# Altium PCB PCB2(1).PcbDoc (part 3 of 3)
Units mil, origin at the board's own origin, x right, y up, seen from the top; angles counter-clockwise.
Board outline 11695.71 x 3821.7 mil, 2 copper layers (Top Layer, Bottom Layer), stack 16 mil thick; 124 components, 59 nets, 380 pads, 1798 vias.
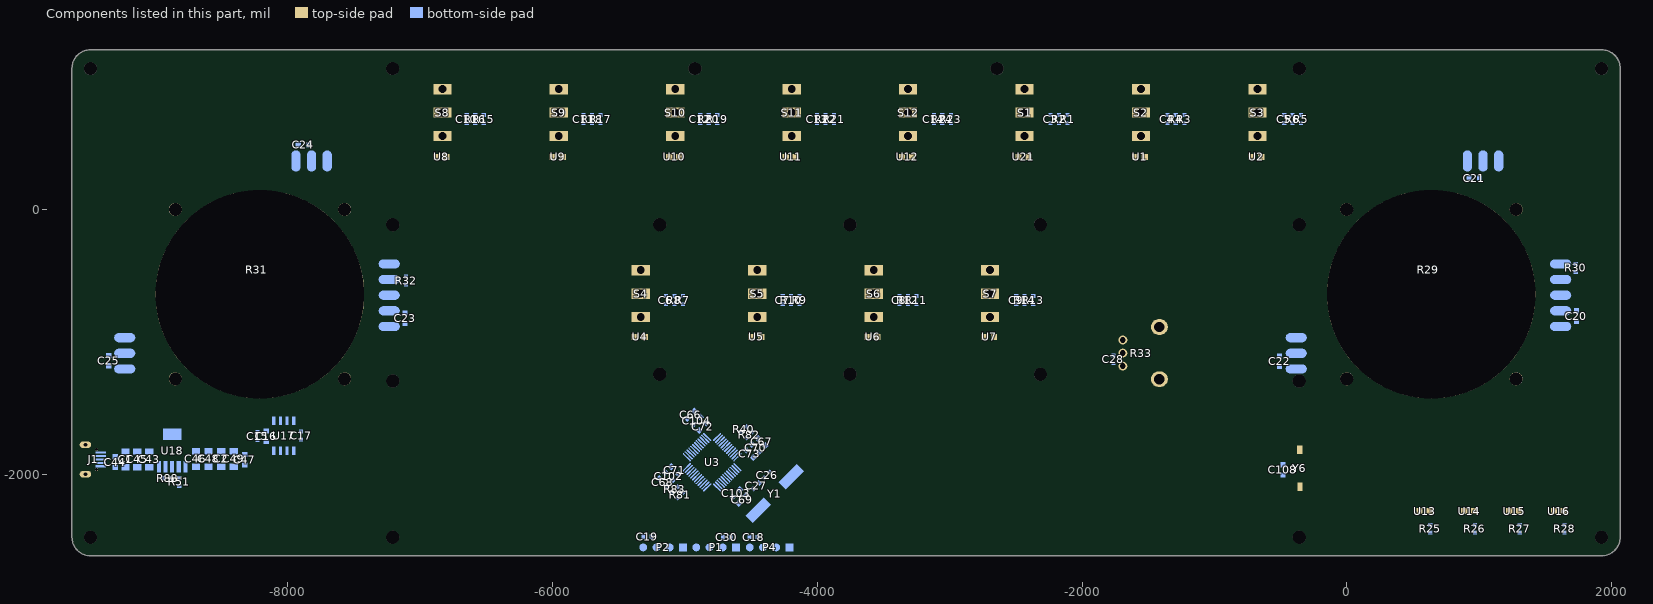
[diagram p3: the components of this part, seen from the top]

## Other copper
Top Layer:
  pour cut-out: -4827.88,-1635.3 -4740.73,-1405 -4740.73,-1635.75 -4739.88,-1636.59
  pour cut-out: -4801.5,-1646.23
  pour cut-out: -7265,300
  pour cut-out: -7332.61,306.63 -7332.61,240.73 -7592.29,500.41 -7795.94,500.41 -7806.02,510.49 -7806.02,523.73 -7554.62,523.73 -7553.24,525.12
  pour cut-out: -4585.5,-1322.38 -4590,-1317.88 -4590,-1190 -4461.47,-1190 -4456.47,-1195
  pour cut-out: -4707.28,-775 -4782.86,-775 -4706.24,-851.62
  pour cut-out: -4707.28,-775
  pour cut-out: -1315.45,-1841.44 -1312.86,-1844.02 -1095.19,-1844.02 -1095.19,-1862.83 -1302.7,-2070.34
  pour cut-out: -1374.7,-1986.35 -1374.7,-2022.76 -1374.7,-2120 -1359.07,-2120 -1305.67,-2066.59
  pour cut-out: -4333.33,-2326.23 -4333.33,-2323.33 -4196.24,-2186.24 -4196.24,-2330
  pour cut-out: -4335.08,980 -4059.49,980 -4059.49,482.16 -4335.08,482.16
  pour cut-out: -2629.22,-990 -2629.22,-983.21 -2406.02,-760 -2354.05,-760 -2346.08,-767.97 -2562.5,-984.38 -2562.5,-992.75
  pour cut-out: -2629.03,-991.51 -2626.68,-993.86 -2570.68,-993.86 -2570.68,-992.56 -2346.08,-767.97 -2354.05,-760 -2356.59,-760
  pour cut-out: -4975,-2085 -5105.08,-1954.92 -5110.18,-1954.92 -4791.86,-1636.59 -4720,-1636.59 -4720,-1646.6 -4527.44,-1839.16
  pour cut-out: -5300,-2013.45 -5575,-2013.45 -5493.83,-2094.62 -5493.83,-2095.11 -5140.87,-2095.11 -5136.25,-2090.49 -5215.64,-2011.11 -5215.64,-2011
  pour cut-out: -4795.52,-2285.96 -4800.52,-2290.96 -4800.52,-2449.97 -4720.13,-2530.36 -4715.51,-2525.74 -4556.46,-2525.74
  pour cut-out: -4928.06,-2326.57 -4928.06,-2508.97 -4923.41,-2513.62 -4934.16,-2524.36 -5092.39,-2524.36 -5092.39,-2501.45 -5097.67,-2496.17
  pour cut-out: -4451.49,-2325.73 -4505.87,-2380.12 -4680.94,-2205.05 -4800.52,-2205.05 -4800.52,-1840.12 -4375,-1840.12
  pour cut-out: -4513.51,-2024.48 -4515,-2025.97 -4515,-2059.71 -4470.66,-2059.71 -4437.32,-2026.37
  pour cut-out: -4522.3,-1920.31
  pour cut-out: -5288.36,-1860 -5327.32,-1860 -5673.97,-1513.36 -5459.62,-1513.36 -5180.71,-1792.27 -5220.62,-1792.27
  pour cut-out: -4912.3,-1854.23 -4880,-1840.12 -4843.79,-1828.62 -4843.79,-1862.7 -4861.09,-1880
  pour cut-out: 1161.14,410 1168.41,402.74 1168.41,330 1695,-196.59 1727.74,-163.86 1735,-163.86
  pour cut-out: 1161.14,410 1161.14,337.26 1168.41,330 995,330 995,408.45 993.45,410
  pour cut-out: -330,410 -280,360 -280,290 -225,235 -222.96,237.04 993.45,237.04 993.45,321.99 993.45,410
  pour cut-out: -585,-125 -622.87,-125 -712.87,-35 -775,-35 -330,410 -275,355 -275,285 -225,235
  pour cut-out: -585,-1140 -775,-1140 -775,-35 -712.87,-35 -622.87,-125 -585,-125
  pour cut-out: -510,-1547.72 -510,-1142.19 -507.81,-1140 -775,-1140 -775,-1550
  pour cut-out: -1482.28,-2520 -1499.19,-2503.08 -1499.19,-2434.16 -1575,-2358.35 -1575,-2350 -768.94,-1543.94 -586.87,-1543.94 -585,-1545.81 -584.73,-1545.53 -507.81,-1545.53
  pour cut-out: -1474.67,-2538.37
  pour cut-out: -4429.41,-2330.85 -4360.26,-2400 -4315,-2400 -4238.1,-2476.9 -4200,-2476.9 -4200,-2510 -4171.63,-2538.37 -1474.67,-2538.37 -1493.92,-2492.78 -1540,-2419.19 -1560.94,-2375 -1581.44,-2330.85
  pour cut-out: -2635.03,-992.75 -2633.79,-991.51 -2578.86,-991.51 -2578.86,-994.97 -2562.5,-992.75
  pour cut-out: -4329.17,-2010 -4352,-1987.17 -4370,-1987.17 -4222,-1839.16 -4203.84,-1839.16 -4203.84,-1928.5
  pour cut-out: -4518.39,-2221.5 -4520.53,-2223.65 -4520.53,-2251.83 -4428.74,-2343.62 -4406.95,-2343.62 -4125.29,-2061.96 -4125.29,-2035.17 -4212.08,-1948.39 -4214.6,-1950.91 -4243.07,-1950.91
  pour cut-out: -4630,-1814.93
  pour cut-out: -3014.37,-1465.63 -2911.77,-1568.23 -2903.12,-1568.23 -2079.88,-745 -2149.88,-675 -2238.75,-675
  pour cut-out: -385.27,-2050.21 -411.87,-2050.21 -382.08,-2080
  pour cut-out: -5010,361.44 -5010,325 -5008.12,325 -4708.12,625 -4730.84,625
  pour cut-out: -4629.27,-780 -4595,-745.73 -4595,-701.97 -4596.97,-701.97 -4670,-775
  pour cut-out: -4855.94,-2514.06 -4852.94,-2517.06 -4829.06,-2517.06 -4829.06,-2486.06 -4850.12,-2465
  pour cut-out: -5088.03,-1620
  pour cut-out: -2350,-742.4 -2321.78,-742.4 -2340,-760.62 -2340,-765
  pour cut-out: -4755.21,624.52 -4754.73,625 -4700.01,625 -4705,620.01 -4705,620
  pour cut-out: -4735.33,624.52
  pour cut-out: -2835.91,-387.66 -2560.32,-387.66 -2560.32,-885.5 -2835.91,-885.5
  pour cut-out: -3715.5,-387.66 -3439.91,-387.66 -3439.91,-885.5 -3715.5,-885.5
  pour cut-out: -4595.08,-387.66 -4319.49,-387.66 -4319.49,-885.5 -4595.08,-885.5
  pour cut-out: -5474.67,-387.66 -5199.08,-387.66 -5199.08,-885.5 -5474.67,-885.5
  pour cut-out: -2295.7,-812.58 -2295.7,-783.05 -2300.32,-778.44 -2041.63,-519.75 -2041.63,-517.61 -2005,-517.61
  pour cut-out: -1715.01,-285.99 -1714.02,-285 -1655,-285 -1655,-286.88 -2903.61,-1535.5 -2908.23,-1530.88 -2908.23,-1481.35
  pour cut-out: -3901.31,-697.51 -3859.18,-655.38 -3455.5,-655.38 -3455.5,-695.12
  pour cut-out: -4555,-1420 -4555.47,-1420.47 -4560.12,-1420.47 -4560.12,-1353.24 -3863.55,-656.67 -3835,-700
  pour cut-out: 405.96,-1989.95 422.99,-1972.93 623.49,-1972.93 899.08,-2248.51 1675,-2248.51 1675,-2415 824.11,-2415
  pour cut-out: -4105,-2525
  pour cut-out: -4529.94,-1588.12 -4529.94,-1465 -2908.23,-1465 -2908.23,-1588.12
  pour cut-out: -717.33,-1880 -717.33,-1974.1 613.92,-1974.1 517.54,-1870
  pour cut-out: -785,-1888.35
  pour cut-out: -522.84,-1110 -489.46,-1110 -489.46,-1146.68 -492.99,-1150.21 -522.84,-1120.36
  pour cut-out: -4622.72,-779.73 -4707.02,-779.73 -4707.28,-780 -4706.24,-781.05 -4706.24,-1632.91 -4623.76,-1715.38
  pour cut-out: -816.73,980 -541.14,980 -541.14,482.16 -816.73,482.16
  pour cut-out: -1696.32,980 -1420.73,980 -1420.73,482.16 -1696.32,482.16
  pour cut-out: -2575.91,980 -2300.32,980 -2300.32,482.16 -2575.91,482.16
  pour cut-out: -3455.5,980 -3179.91,980 -3179.91,482.16 -3455.5,482.16
  pour cut-out: -5221.73,980 -4946.14,980 -4946.14,482.16 -5221.73,482.16
  pour cut-out: -6094.26,980 -5818.67,980 -5818.67,482.16 -6094.26,482.16
  pour cut-out: -6973.85,980 -6698.26,980 -6698.26,482.16 -6973.85,482.16
  pour cut-out: -6973.85,982.16 -6698.26,982.16 -6698.26,482.16 -6973.85,482.16
  pour cut-out: -5192.72,95 -5177.92,95 -5192.92,80 -5193.36,80
  pour cut-out: -4992.02,-2002.02
  pour cut-out: -4998.08,-1998.02
  pour cut-out: -4936.56,-2211.77
  pour cut-out: -8187.95,-1867.61
  pour cut-out: -9380,-1939.76 -9374.76,-1939.76 -8142.83,-1939.76 -8061,-1857.94 -7950,-1857.94 -7950,-1780 -7955,-1780 -7956.62,-1780 -8090,-1780 -8090,-1782.29 -8187.95,-1867.61 -8200.58,-1867.61 -9380,-1867.61
Bottom Layer:
  pour cut-out: -1552.44,-919.79 -1461.3,-828.64 -1638.64,-828.64 -1640,-830
  pour cut-out: -1439.54,-1032.68 -1370.17,-963.31 -1370.17,-909.83 -1245,-1035
  pour cut-out: -4981.01,-1792.13 -4967.1,-1778.22 -5011.89,-1733.42 -5011.89,-1734.55 -5052.3,-1774.96
  pour cut-out: -4872.84,-1415 -4872.84,-1415.58 -4923.33,-1466.06 -4956.97,-1432.43 -4956.97,-1415
  pour cut-out: -4400.3,-1988.92 -4400,-1988.62 -4400,-1837.09 -4475.64,-1912.73 -4468.2,-1920.16 -4468.2,-2005.48
  pour cut-out: -5134.06,-2245 -5276.55,-2245 -5275.49,-2243.94 -5275.49,-2114.36 -5221.16,-2114.36 -5220.59,-2114.93
  pour cut-out: -4475.64,-1965.24 -4475.64,-1912.73 -4472.92,-1910.01 -4473.5,-1909.44 -4615.17,-1909.44 -4615.17,-1916.66 -4560.18,-1971.65 -4545.34,-1971.65
  pour cut-out: -4726.63,-1931.57 -4725.93,-1932.27 -4659.92,-1932.27 -4659.92,-1927.74 -4641.63,-1909.44 -4648.17,-1902.9 -4648.17,-1885.17 -4672.37,-1885.17 -4714.6,-1842.95 -4731.77,-1860.12 -4731.77,-1875.53
  pour cut-out: -753.9,958.7 -753.9,685.59 -596.1,685.59 -596.1,958.7
  pour cut-out: -1633.49,958.7 -1633.49,685.59 -1475.69,685.59 -1475.69,958.7
  pour cut-out: -2513.07,958.7 -2513.07,685.59 -2355.28,685.59 -2355.28,958.7
  pour cut-out: -3392.66,958.7 -3392.66,685.59 -3234.87,685.59 -3234.87,958.7
  pour cut-out: -4272.25,958.7 -4272.25,685.59 -4114.45,685.59 -4114.45,958.7
  pour cut-out: -5151.84,958.7 -5151.84,685.59 -4994.04,685.59 -4994.04,958.7
  pour cut-out: -6031.42,958.7 -6031.42,685.59 -5873.63,685.59 -5873.63,958.7
  pour cut-out: -6911.01,958.7 -6911.01,685.59 -6753.22,685.59 -6753.22,958.7
  pour cut-out: -5411.84,-408.97 -5411.84,-682.08 -5254.04,-682.08 -5254.04,-408.97
  pour cut-out: -4532.25,-408.97 -4532.25,-682.08 -4374.45,-682.08 -4374.45,-408.97
  pour cut-out: -2773.07,-408.97 -2773.07,-682.08 -2615.28,-682.08 -2615.28,-408.97
  pour cut-out: -4331.28,-2229.52 -4355.35,-2205.45 -4355.35,-2167.37 -4299.04,-2111.07 -4260.96,-2111.07 -4236.89,-2135.14
  pour cut-out: -4361.05,-2028.16 -4380.73,-2047.84 -4323.54,-2105.03 -4303.95,-2105.03 -4285.47,-2086.55 -4288.55,-2086.55 -4312.93,-2062.17
  pour cut-out: -4439.41,-2105.32 -4405,-2139.72 -4405,-2160 -4400.8,-2160 -4379.86,-2180.94 -4362.33,-2163.41 -4362.33,-2141.4 -4414.78,-2088.96 -4416.52,-2088.96
  pour cut-out: -4941.65,-1909.44 -4919.68,-1887.47 -4906.33,-1887.47 -4874.32,-1919.47 -4853.84,-1898.98 -4853.84,-1880.66 -4736.9,-1880.66 -4726.63,-1870.4 -4726.63,-1931.57 -4668.69,-1931.57 -4794.11,-2056.99
  pour cut-out: -4378.52,-2123.37 -4380.38,-2123.37 -4392.74,-2111.01 -4392.74,-2133.72
  pour cut-out: -4383.55,-2051.27 -4384.77,-2051.27 -4418.63,-2085.12 -4451.34,-2052.41 -4451.34,-2051.52
  pour cut-out: -4532.26,-2205
  pour cut-out: -4443.1,-2044.94 -4435.64,-2037.47 -4435.64,-2052.98 -4435,-2053.62
  pour cut-out: -4445.89,-1890.05
  pour cut-out: -4773.35,-1798.3 -4721.65,-1850 -4707.54,-1835.9 -4706.65,-1835.9 -4706.65,-1835.1 -4768.63,-1773.12 -4773.35,-1777.83
  pour cut-out: -4579.07,-1845.88 -4496.17,-1845.88 -4510.57,-1860.33 -4580,-1860.33
  pour cut-out: -5013.39,-2095.9 -5094.02,-2176.54 -5094.02,-2202.46 -5049.36,-2247.12 -4974.41,-2247.12 -4974.41,-2134.88
  pour cut-out: -4468.54,-2556.22 -4443.64,-2556.22 -4416.52,-2529.1 -4416.52,-2511.97 -4473.5,-2511.97 -4475.47,-2510
  pour cut-out: -5180,-2500.53 -5170,-2490.53 -5115,-2490.53 -5115,-2494.89 -5215,-2594.89 -5115,-2594.89
  pour cut-out: -7930.97,-1553.18 -7930.97,-1540 -7986.82,-1540 -8000,-1553.18
  pour cut-out: -8908.52,-1998.35 -8895.91,-1998.35 -8895,-1999.26 -8895,-2043.73 -8909.26,-2029.47
  pour cut-out: -8825.32,-2055.04 -8848.25,-2055.04 -8848.25,-2060.96 -8826.51,-2060.96
  pour cut-out: 1713.04,-797.43 1766.68,-797.43 1766.68,-812.8 1718.68,-812.8 1713.04,-807.17
  pour cut-out: -6385,-1785
  pour cut-out: -1461.3,-828.64 -1580,-947.35 -1580,-950 -1370.85,-950 -1470.85,-1050 -1475,-1050
  pour cut-out: -1735.61,-998.3 -1735.61,-1072.99 -1723.74,-1084.86 -1645.46,-1084.86 -1645.46,-1000.35 -1650,-995.81
  pour cut-out: -6544.62,737.03 -6489.5,737.03 -6489.5,592.22 -6489.31,592.03 -6547.05,592.03
  pour cut-out: -5662.36,736.92 -5607.24,736.92 -5607.24,592.11 -5607.05,591.92 -5664.8,591.92
  pour cut-out: -4780.22,736.92 -4725.1,736.92 -4725.1,592.11 -4724.91,591.92 -4782.66,591.92
  pour cut-out: -3898.08,736.92 -3842.96,736.92 -3842.96,592.11 -3842.77,591.92 -3900.51,591.92
  pour cut-out: -3015.93,736.92 -2960.81,736.92 -2960.81,592.11 -2960.62,591.92 -3018.37,591.92
  pour cut-out: -2133.79,736.92 -2078.67,736.92 -2078.67,592.11 -2078.48,591.92 -2136.23,591.92
  pour cut-out: -1251.37,737.92 -1196.25,737.92 -1196.25,593.11 -1196.06,592.92 -1253.8,592.92
  pour cut-out: -369.51,736.92 -314.39,736.92 -314.39,592.11 -314.2,591.92 -371.94,591.92
  pour cut-out: -5638.3,-853.58 -5638.3,-863.3 -5640,-865 -1737.17,-865 -1737.17,-770 -1737.48,-770.3 -5685,-770.3
  pour cut-out: -1672.66,-915 -1737.68,-849.98 -1737.68,-983.92 -1735.16,-986.44
  pour cut-out: -5040.22,-630 -4985.1,-630 -4985.1,-774.81 -4984.91,-775 -5042.66,-775
  pour cut-out: -2393.79,-630 -2338.67,-630 -2338.67,-774.81 -2338.48,-775 -2396.23,-775
  pour cut-out: -3275.93,-630 -3220.81,-630 -3220.81,-774.81 -3220.62,-775 -3278.37,-775
  pour cut-out: -4160.63,-630 -4105.51,-630 -4105.51,-774.81 -4105.32,-775 -4163.07,-775
  pour cut-out: -5255,-681.96 -4987.04,-681.96 -4987.04,-628.04 -5167.7,-628.04 -5260,-623.04
  pour cut-out: -4380,-681.96 -4105.11,-681.96 -4105.11,-628.04 -4285.77,-628.04 -4380,-628.04
  pour cut-out: -2625,-681.96 -2341.25,-681.96 -2341.25,-628.04 -2521.91,-628.04 -2665.42,-641.54
  pour cut-out: -3504.47,-681.96 -3223.18,-681.96 -3223.18,-628.04 -3403.84,-628.04 -3500.4,-628.04
  pour cut-out: -3652.66,-408.97 -3652.66,-682.08 -3494.87,-682.08 -3494.87,-408.97
  pour cut-out: -4870,-2475 -4869.47,-2475.53 -4815,-2475.53 -4815,-2593.89 -4814,-2594.89 -4914,-2594.89
  pour cut-out: -4965,-2565
  pour cut-out: -4410,-2594.89 -4310,-2594.89 -4340,-2564.89 -4340,-2495.53 -4417.81,-2495.53
  pour cut-out: -506.13,-2050.5 -494.31,-2038.69 -471.82,-2038.69 -460,-2050.5
  pour cut-out: -1614.94,-962.84 -1669.4,-1017.29 -1669.4,-1110 -1470.02,-1110
  pour cut-out: -4350,-2379.88
  pour cut-out: -2130.54,-735.8 -2123.28,-735.8 -2122.91,-736.18 -2122.91,-753.39
  pour cut-out: -2978.96,-735.8 -2969.18,-735.8 -2977.95,-744.57 -2977.95,-748.23
  pour cut-out: -3851.32,-735.8 -3858.96,-735.8 -3858.96,-756.85 -3851.32,-749.21
  pour cut-out: -4738.96,-735.8 -4738.96,-745.34 -4737.95,-746.36 -4733.46,-741.88 -4733.46,-735.8
  pour cut-out: -4776.96,-735.8 -4776.96,-749.68 -4773.63,-753.01 -4773.63,-735.8
  pour cut-out: -4776.96,-693.88
  pour cut-out: -6753.22,739.59 -6491.94,739.59 -6491.94,685.07 -6753.22,685.07
  pour cut-out: -5873.63,742.02 -5607.24,739.35 -5607.24,685.07 -5873.63,685.07
  pour cut-out: -4994.04,739.59 -4724.91,739.59 -4724.91,685.07 -4994.04,685.07
  pour cut-out: -4114.45,739.59 -3843.35,739.59 -3843.35,685.07 -4114.45,685.07
  pour cut-out: -2355.28,739.59 -2078.67,739.59 -2078.67,684.96 -2355.28,684.96
  pour cut-out: -1475.69,739.59 -1198.8,739.59 -1198.8,684.96 -1475.69,684.96
  pour cut-out: -596.1,739.59 -325,739.59 -325,684.96 -596.1,684.96
  pour cut-out: -7317.68,505.72
  pour cut-out: -596.1,600 -7875,600 -7880,595 -7880,510 -600.47,510 -596.19,505.72 -7317.68,505.72
  pour cut-out: -5095.64,-1789.85
  pour cut-out: -5265.07,-2457.42 -5342.32,-2380.17 -5346.04,-2570.92
  pour cut-out: -7084.79,-528.04 -7055,-528.04 -7055,-486.65 -7055.53,-486.12 -7084.79,-486.12
  pour cut-out: -7087.89,-792.42 -7087.89,-835.8 -7094.66,-829.03 -7130.57,-829.03 -7130.57,-796.85 -7135,-792.42
  pour cut-out: 942.68,528.73 942.68,210 944.04,211.35 1027.94,211.35 1027.94,528.73
  pour cut-out: -1305,-1870 -1305,-2030 -1304.38,-2030.62 -670,-2030.62 -670,-1870
  pour cut-out: -1293.2,-1883.76
  pour cut-out: -4817.85,-1755.01 -4825.89,-1763.05 -4800.4,-1788.55 -4800.4,-1789.85 -4797.69,-1789.85 -4795.78,-1787.94 -4795.78,-1756.88 -4800.13,-1756.88 -4801.99,-1755.01
  pour cut-out: -4923.33,-1878.85 -4906.11,-1896.08 -4895,-1884.97 -4895,-1858.1 -4903.1,-1850 -4923.33,-1870.23
  pour cut-out: -4260,-2548.11
  pour cut-out: -4267.44,-2578.34
  pour cut-out: -264.13,-1010.93 -264.13,-1269.92 -555,-1269.92 -555,-1010.93
  pour cut-out: -7870.06,500 -7870.06,505.72 -7852.05,523.73 -7760,523.73 -7760,500.06 -7760.06,500
  pour cut-out: -7980.06,213.9 -7980.06,500 -7760.06,500 -7760.06,459.97 -7760.06,213.9
  pour cut-out: -9435,-1045 -9125,-1045 -9125,-1265 -9137.92,-1265 -9435,-1265
  pour cut-out: 1455.87,-365 1713.04,-365 1713.04,-935 1454.13,-935
  pour cut-out: -7518.66,-365 -7130.57,-365 -7130.57,-935 -7520.41,-935
  pour cut-out: -4861.82,-580
  pour cut-out: -3234.87,739.59 -2960.62,739.59 -2960.62,685.07 -3234.87,685.07
  pour cut-out: -5118.15,-2218.47 -5115.42,-2218.47 -5087.44,-2246.44 -5087.44,-2219.53
  pour cut-out: -4862.49,-1683.57 -4862.49,-1630 -4826.69,-1630 -4835.07,-1638.38 -4835.07,-1683.57
  pour cut-out: -4510,-1586.59
  pour cut-out: -4510,-1465 -4510,-1568.23 -4538.81,-1568.23 -4669.62,-1699.04 -4681.15,-1699.04 -4697.47,-1715.37 -4697.47,-1602.47 -4560,-1465
  pour cut-out: -7937.76,-1636.96 -7936.97,-1636.18 -7920.65,-1652.5 -7920.65,-1698.81 -7877.15,-1698.81 -7877.15,-1630 -7947.98,-1559.18 -8086.97,-1559.18 -8086.97,-1636.96
  pour cut-out: -8163.24,-1703.89
  pour cut-out: -8123.97,-1777.59 -7936.97,-1777.59 -7936.97,-1866.59 -8123.97,-1866.59

## Silkscreen, mask and mechanical layers (free items; w line width, h text height)
Top Overlay:
  text "机械臂" at -2600,141.11 h150
  text "灯光" at -740,140.56 h150
  text "定深" at -1623.49,140 h150
  text "1" at -6850,136.95 h100
  text "2" at -5970,136.95 h100
  text "3" at -5090,136.95 h100
  text "4" at -4230,136.95 h100
  text "5" at -3360,136.95 h100
  text "6" at -5385,-1190 h100
  text "7" at -4485,-1190 h100
  text "8" at -3600,-1190 h100
  text "9" at -2710,-1190 h100
  text "D0" at 890,-2463.89 h100
  text "PWR" at 490,-2465 h100
  text "D1" at 1225,-2465 h100
  text "D2" at 1570,-2465 h100
  text "3.3" at -4541.18,-2568.89 h60
  text "IO" at -4427.92,-2570.92 h60
  text "CLK" at -4359.36,-2572.11 h60
  text "G" at -4225.79,-2572.11 h60
  text "G" at -5035.65,-2573.19 h60
  text "3.3" at -4741.92,-2573.19 h60
  text "G" at -4640,-2573.19 h60
  text "3.3" at -5351.28,-2573.94 h60
  text "TX" at -5251.28,-2573.94 h60
  text "RX" at -5150,-2575.59 h60
  text "A11" at -4964,-2575 h60
  text "A12" at -4861.89,-2575.59 h60
Mechanical 1:
  the board outline again, w5.91